# Altium PCB Telemetry_Module_old.PcbDoc (part 2 of 2)
Units mm, origin at the board's own origin, x right, y up, seen from the top; angles counter-clockwise.
Board outline 50 x 50 mm, 4 copper layers (Top Layer, GND, Power, Bottom Layer), stack 0.603 mm thick; 94 components, 68 nets, 386 pads, 193 vias.
Unrouted connection lines stored in the file: 22.
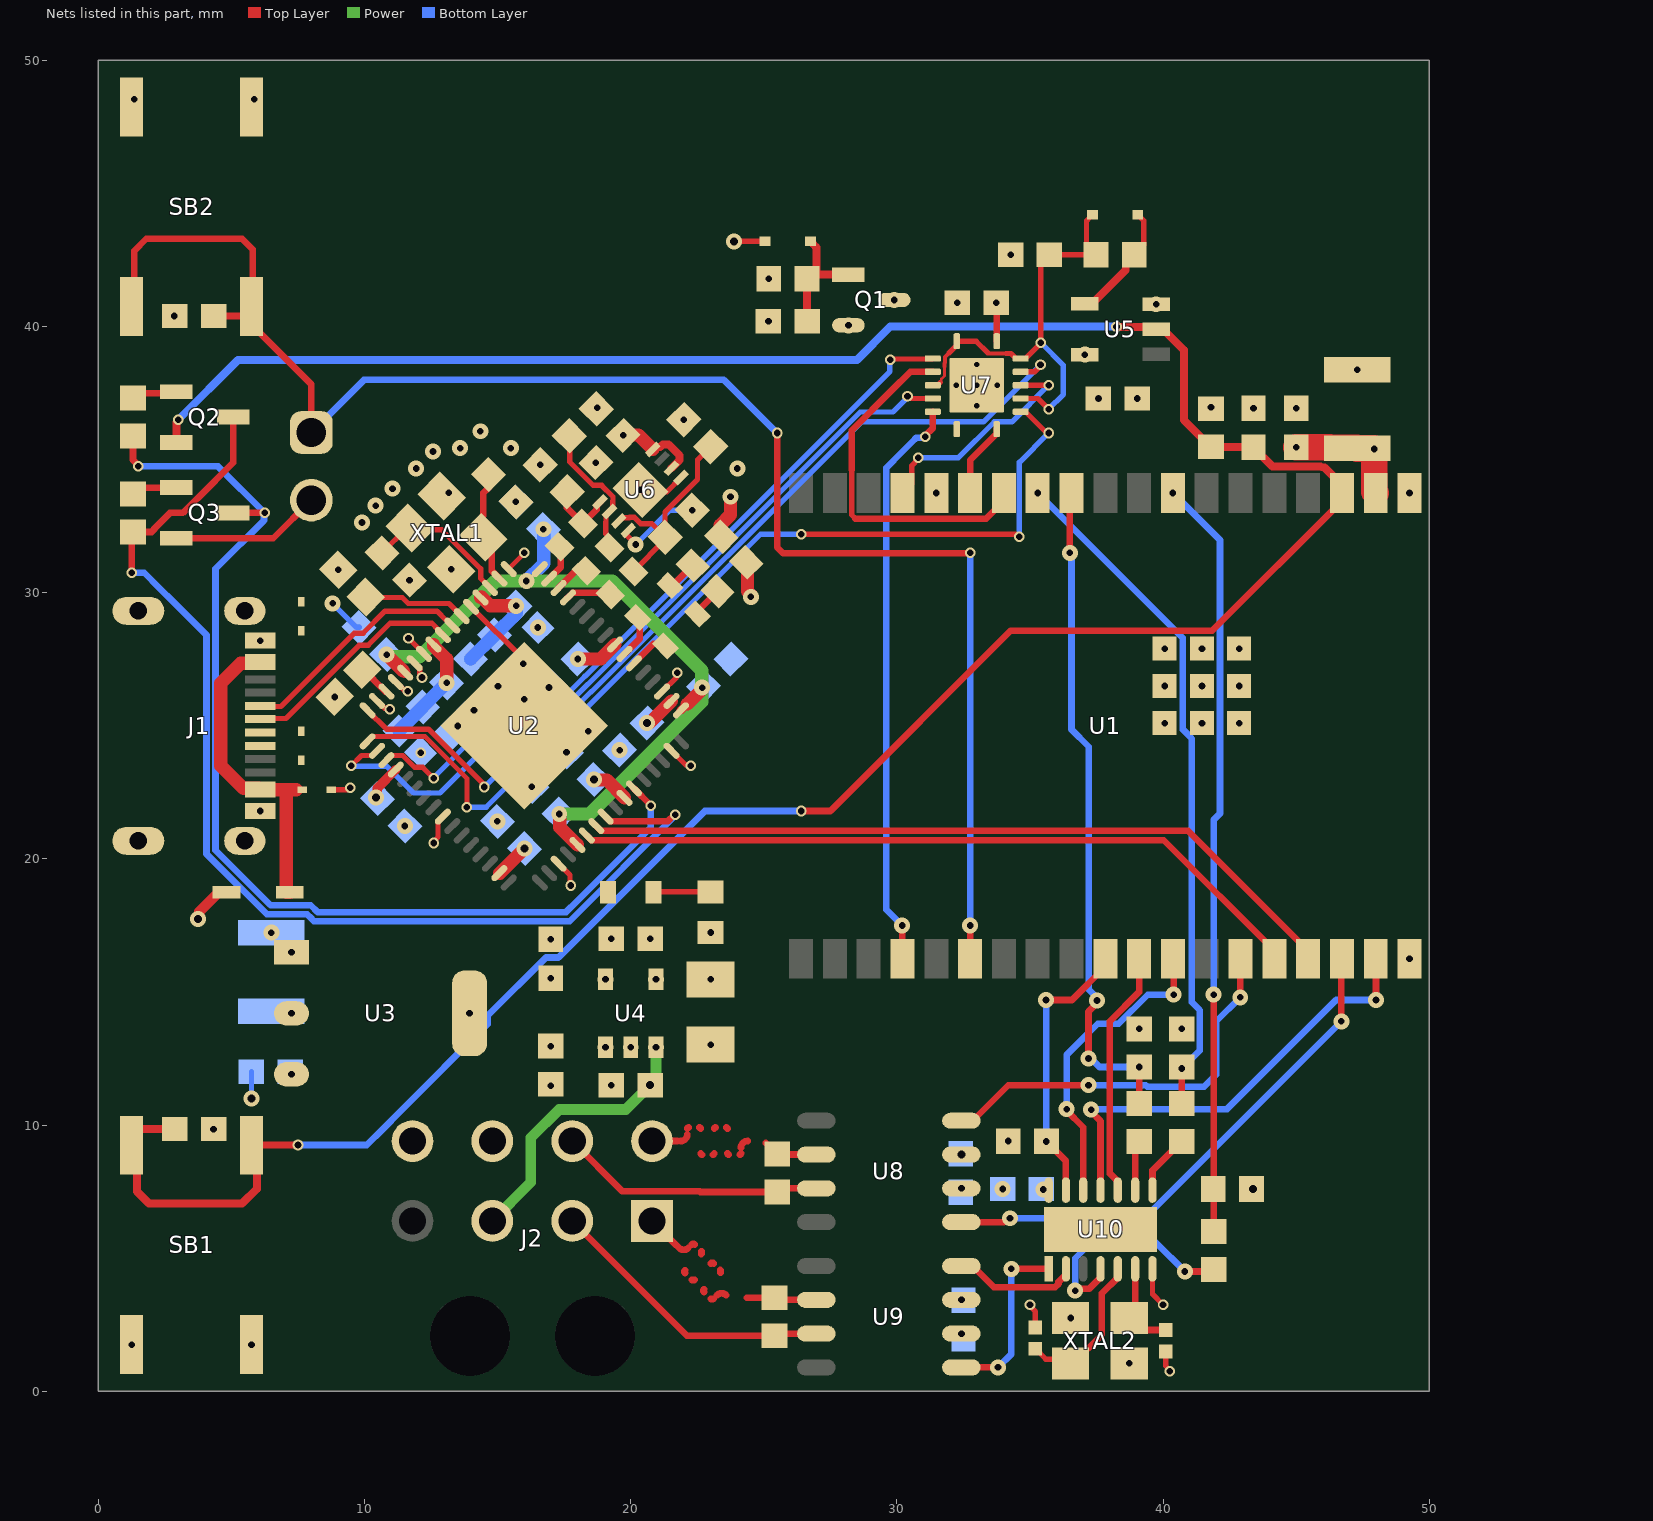
[diagram p4: the nets of this part, all layers, seen from the top]

## Via types
v1: diameter 0.6, hole 0.25, Top Layer to Bottom Layer, 136 vias
v2: diameter 0.4, hole 0.25, Top Layer to Bottom Layer, 40 vias
v3: diameter 0.6, hole 0.3, Top Layer to Bottom Layer, 10 vias
v4: diameter 0.5, hole 0.2, Top Layer to Bottom Layer, 5 vias
v5: diameter 0.5, hole 0.25, Top Layer to Bottom Layer, 2 vias

## Nets (pads, with @x,y where several pads share a name; then routed paths per layer and width w, separated by ;. In a path a pad name is that pad's centre, name@x,y a point inside that pad or via, vN(x,y) a via of type N, cw(c..) or ccw(c..) an arc to the next point about the centre after c; other vN are vias at no path point)
1V8: C10.1 C11.1 C12.1 C21.1 U2.12 U2.37 U2.49 U2.64 | length 28.6
  Top Layer w0.322: U2.49@21.887,25.583 U2.49@22.122,25.819
  Top Layer w0.4: U2.12@11.452,27.06 11.515,26.998 U2.12@11.528,26.998
  Top Layer w0.5: v1(10.828,27.672) 10.841,27.672 U2.12@11.452,27.06 ; v1(17.314,21.686) 17.333,21.667 17.333,21.192 U2.37@17.998,20.528 ; U2.49@22.122,25.819 22.665,26.362 22.665,26.415 v1(22.684,26.434)
  Power w0.5: v1(10.828,27.672) 10.855,27.672 10.936,27.591 12.067,27.591 14.918,30.442 v1(16.076,30.442) 19.303,30.442 22.665,27.08 22.665,26.453 v1(22.684,26.434) 22.665,26.415 22.665,25.9 18.451,21.686 v1(17.314,21.686)
  Bottom Layer w0.5: v1(16.076,30.442) 16.73,31.096 16.73,32.37 v1(16.714,32.386)
3V3: C1.1 C2.1 C6.1 C7.1 C8.1 C9.1 C13.1 C20.1 C22.1 C23.1 C29.1 C32.1 C33.1 C34.1 FB1.1 FB2.1 Q1.2 R1.2 R5.2 R7.1 R9.2 R10.2 R15.2 R16.2 R17.2 R21.2 R22.2 R23.2 R24.2 U1.2 U2.20 U2.31 U2.42 U2.50 U2.56 U4.4 U6.6 U6.8 U8.3 U9.3 U10.14 | length 17.9
  Top Layer w0.3: U6.8@20.826,35.386 20.915,35.475 21.108,35.475 21.205,35.573 21.427,35.573 21.838,35.162 21.838,34.985 U6.6@21.533,34.679
  Top Layer w0.35: v3(10.434,22.316) 10.482,22.364 10.482,22.664 U2.20@11.174,23.356 ; U2.31@15.063,19.467 U2.31@15.079,19.467 ; v3@15.998,20.386 v3(16.014,20.386)
  Top Layer w0.5: U2.31@15.079,19.467 v3@15.998,20.386 ; v1(18.014,27.514) 18.868,27.514 U2.56@19.412,28.058 ; v3(18.614,22.986) 18.633,22.967 19.094,22.967 U2.42@19.765,22.295 ; v1(19.714,35.914) 19.73,35.93 20.282,35.93 U6.8@20.826,35.386 ; v3(20.614,25.114) 20.633,25.133 20.729,25.133 U2.50@21.533,25.937 ; R9.2@23.406,32.106 23.363,32.148 23.363,32.544 23.749,32.93 v1(23.749,33.607) ; R10.2@24.341,31.141 24.383,31.099 24.383,30.054 24.511,29.926 v1(24.511,29.845)
  Top Layer w0.99: v1(45,35.473) C1.1@46.229,35.473
  Top Layer w1: C1.1@46.229,35.473 46.27,35.473 46.298,35.444 47.278,35.444 C1.1@47.3,35.422 47.918,35.422 v1(47.94,35.4) 47.94,33.8 U1.2@47.99,33.75
  other v1: 32.425,3.435 35.5,7.578 34.185,9.4 39.1,13.615 40.7,13.615 20.95,15.475 23,15.475 20.727,17 23,17.235 8.886,26.086 16.507,28.693 16.594,34.806 21.994,36.506 18.748,36.948 41.8,36.975 28.18,40.05 25.173,40.2
  other v2: 12.107,23.993
  other v3: 43.375,7.6 32.425,8.894
3V3_D: C26.1 C28.1 Q1.3 U5.5 U7.14 | length 1.5
  Top Layer w0.25: v1(33.727,40.9) 33.75,40.877 U7.14@33.75,39.45
  other v1: 37.573,37.3 37.06,38.947 29.9,41
\ESP_EN: C27.1 D8.1 R11.1 U7.1 U7.4 U7.10 U7.13 | length 17.1
  Top Layer w0.103: 31.64,37.91 31.669,37.939 31.669,38.03 31.791,38.151 31.791,38.495
  Top Layer w0.108: D8.1@37.324,44.2 D8.1@37.349,44.2
  Top Layer w0.147: 31.791,38.495 31.791,38.62 31.813,38.642 31.813,38.862 31.964,39.014 ; 33.415,39.014 33.442,38.988 34.1,38.988
  Top Layer w0.159: D8.1@37.303,44.179 D8.1@37.324,44.2
  Top Layer w0.183: U7.4@31.621,37.891 31.64,37.91
  Top Layer w0.2: U7.4@31.35,37.8 31.53,37.8 U7.4@31.621,37.891 ; 31.964,39.014 32.2,39.25 32.23,39.25 32.25,39.27 U7.1@32.25,39.45 32.979,39.45 33.415,39.014 ; 34.1,38.988 34.283,38.988 34.47,38.8 U7.13@34.65,38.8 34.83,38.8 35.4,39.37 35.4,39.4 35.4,42.373 C27.1@35.727,42.7 R11.1@37.485,42.7 37.121,43.064 37.121,43.971 37.246,44.097 37.246,44.122 D8.1@37.303,44.179 ; U7.10@34.65,37.3 35.3,37.3 v2(35.7,36.9)
  Bottom Layer w0.2: v2(35.4,39.396) 35.404,39.396 36.254,38.546 36.254,37.454 v2(35.7,36.9)
CAN1_H: J2.6 R19.2 U8.7 | length 10
  Top Layer w0.25: J2.6@17.8,9.4 19.69,7.51 19.88,7.51 21.72,7.51 22.583,7.51 22.608,7.485 R19.2@25.5,7.485 25.64,7.624 U8.7@26.975,7.624
CAN1_L: J2.5 R19.1 U8.6 | length 4.4
  Top Layer w0.25: J2.5@20.8,9.4 21.75,9.4 ; 21.875,9.4 ccw(c21.875,9.65) 22.125,9.65 ; 22.125,9.858 cw(c22.175,9.858) 22.175,9.908 ; 22.579,9.908 cw(c22.579,9.858) 22.629,9.858 ; 22.629,8.942 ccw(c22.679,8.942) 22.679,8.892 ; 23.083,8.892 ccw(c23.083,8.942) 23.133,8.942 ; 23.133,9.858 cw(c23.183,9.858) 23.183,9.908 ; 23.587,9.908 cw(c23.587,9.858) 23.637,9.858 ; 23.637,8.942 ccw(c23.687,8.942) 23.687,8.892 ; 24.091,8.892 ccw(c24.091,8.942) 24.141,8.942 ; 24.141,9.15 cw(c24.391,9.15) 24.391,9.4 ; R19.1@25.075,9.327 25.486,8.915 R19.1@25.5,8.915 25.521,8.894 U8.6@26.975,8.894
CAN2_H: J2.2 R20.2 U9.7 | length 11
  Top Layer w0.25: J2.2@17.8,6.4 22.115,2.085 R20.2@25.4,2.085 25.48,2.165 U9.7@26.975,2.165
CAN2_L: J2.1 R20.1 U9.6 | length 5.7
  Top Layer w0.25: J2.1@20.8,6.4 21.725,5.475 ; 21.813,5.387 ccw(c21.99,5.563) 22.167,5.387 ; 22.041,4.441 cw(c22.094,4.494) 22.041,4.548 ; 22.29,4.191 ccw(c22.344,4.245) 22.397,4.191 ; 22.296,5.516 cw(c22.349,5.462) 22.403,5.516 ; 22.652,5.159 ccw(c22.599,5.213) 22.652,5.266 ; 22.754,3.728 cw(c22.807,3.781) 22.754,3.835 ; 23.003,3.479 ccw(c23.056,3.532) 23.11,3.479 ; 23.009,4.803 cw(c23.062,4.749) 23.116,4.803 ; 23.239,3.608 cw(c23.416,3.431) 23.592,3.608 ; 23.365,4.446 ccw(c23.312,4.5) 23.365,4.553 ; 24.355,3.515 R20.1@25.4,3.515 25.48,3.435 U9.6@26.975,3.435
EE_CS: R12.1 R15.1 U6.1 | length 2.5
  Top Layer w0.25: R15.1@17.606,33.794 17.596,33.785 17.596,33.3 17.606,33.291 17.606,33.194 R12.1@18.2,32.6 18.719,33.119 18.719,33.28 U6.1@18.843,33.404
EE_DATA: R14.1 R17.1 R18.1 U6.3 | length 7.9
  Top Layer w0.2: U6.3@19.551,32.697 19.676,32.822 19.939,32.822 19.951,32.834 20.139,32.834 20.374,32.599 20.79,32.599 R18.1@21.285,32.104 ; R14.1@20.1,30.8 R18.1@21.294,31.994 ; R18.1@21.294,32.094 R18.1@21.285,32.104 ; R17.1@23.006,35.494 22.505,34.993 22.505,34.253 21.285,33.032 R18.1@21.285,32.104
EE_SCK: R13.1 R16.1 U6.2 | length 5.2
  Top Layer w0.2: R16.1@17.694,35.894 17.704,35.885 17.704,34.924 18.591,34.036 18.905,34.036 19.334,33.607 19.334,33.451 19.322,33.439 19.322,33.176 U6.2@19.197,33.051 19.072,32.925 19.072,32.662 19.06,32.65 19.06,32.218 19.2,32.078 R13.1@19.2,31.7
ESP_EN: C3.1 C4.1 Q2.2 R1.1 SB1.2 SB1.4 U1.3 U5.2 | length 112
  Top Layer w0.25: SB1.4@5.75,9.247 5.753,9.25 v2(7.5,9.25) ; v2(26.4,21.8) 27.5,21.8 34.279,28.579 39.779,28.579 40.341,28.579 41.179,28.579 41.741,28.579 41.849,28.579 46.72,33.45 U1.3@46.72,33.75
  Top Layer w0.277: 45.918,34.739 45.934,34.739 45.951,34.722 45.992,34.722 45.997,34.717 46.053,34.717 46.064,34.706
  Top Layer w0.3: C4.1@2.873,9.85 1.632,9.85 1.45,9.668 1.45,7.5 1.9,7.05 5.4,7.05 5.95,7.6 SB1.4@5.95,9.197 ; Q2.2@2.933,35.65 2.933,36.406 3,36.473 v2(3,36.5) ; v2(38.25,40) 38.269,39.981 39.659,39.981 U5.2@39.74,39.9 40,39.9 40.787,39.114 40.787,36.484 41.786,35.485 R1.1@41.8,35.485 43.388,35.485 C3.1@43.4,35.473 43.4,35.45 44.111,34.739 45.918,34.739 ; 46.064,34.706 46.72,34.05 U1.3@46.72,33.75
  Bottom Layer w0.25: v2(7.5,9.25) 10.08,9.25 10.69,9.86 11.34,10.51 14.624,13.794 14.624,14.108 16.814,16.298 17.281,16.298 22.784,21.8 v2(26.4,21.8)
  Bottom Layer w0.3: v2(3,36.5) 5.25,38.75 28.5,38.75 29.75,40 v2(38.25,40)
ESP_IO0_B: JP1.2 Q3.2 | length 5.7
  Top Layer w0.25: Q3.2@2.933,32.05 6.57,32.05 JP1.2@8,33.48
EXT_3V3: C24.1 J2.3 U4.3 | length 10.5
  Power w0.4: J2.3@14.8,6.4 16.247,7.847 16.247,9.523 17.309,10.585 19.812,10.585 v3(20.727,11.5) 20.727,11.554 20.95,11.777 v1(20.95,12.925)
FTDI_DTR: Q3.3 R3.2 U2.43 | length 41.7
  Top Layer w0.25: R3.2@1.3,35.885 1.3,34.991 1.5,34.791 v2(1.5,34.75) ; Q3.3@5.067,33 v2(6.25,33) ; U2.43@20.119,22.649 20.75,22.018 v2(20.75,22)
  Bottom Layer w0.25: v2(1.5,34.75) 4.5,34.75 v2(6.25,33) 6.221,32.971 6.221,32.721 4.4,30.9 4.4,29.672 4.4,28.968 4.4,21.032 4.4,20.328 4.898,19.83 6.47,18.258 7.979,18.258 8.237,18 17.569,18 17.99,18.421 18.329,18.76 20.75,21.181 v2(20.75,22)
FTDI_RTS: Q2.3 R4.2 U2.40 | length 43.3
  Top Layer w0.25: v2(1.25,30.75) 1.25,32.235 R4.2@1.3,32.285 1.999,32.285 2.11,32.395 2.11,32.418 2.235,32.543 2.692,33 3.175,33 3.631,33.457 3.757,33.582 5.067,34.892 Q2.3@5.067,36.6 ; U2.40@19.058,21.588 19.235,21.411 21.382,21.411 21.634,21.663 v2(21.674,21.663)
  Bottom Layer w0.25: v2(1.25,30.75) 1.722,30.75 2.302,30.17 2.8,29.672 4.061,28.411 4.061,20.188 6.329,17.919 7.839,17.919 7.964,17.794 8.097,17.661 17.709,17.661 21.674,21.626 v2(21.674,21.663)
FTDI_TCK: U2.16 U7.12 | length 34
  Top Layer w0.2: U2.16@10.113,25.583 10.822,24.875 12.396,24.875 14.462,22.809 14.462,22.738 v2(14.5,22.7) ; U7.12@34.65,38.3 35.177,38.3 35.394,38.516 v2(35.394,38.566)
  Bottom Layer w0.2: v2(14.5,22.7) 16.858,25.058 17.287,25.058 18.512,26.282 18.524,26.282 28.663,36.421 33.25,36.421 v2(35.394,38.566) v2(35.394,38.566)
FTDI_TDI: U2.17 U7.9 | length 36.3
  Top Layer w0.185: U2.17@10.113,24.417 10.29,24.593 12.279,24.593 13.844,23.029 v2(13.844,21.946)
  Top Layer w0.2: v2(26.4,32.2) 34.446,32.2 34.546,32.1 v2(34.6,32.1) ; U7.9@34.65,36.8 34.83,36.8 35.592,36.038 35.662,36.038 v2(35.7,36)
  Bottom Layer w0.185: 16.736,24.109 17.484,24.857 17.495,24.857 17.65,25.012
  Bottom Layer w0.2: v2(13.844,21.946) 14.573,21.946 16.736,24.109 ; 17.65,25.012 17.687,25.012 24.875,32.2 v2(26.4,32.2) ; v2(34.6,32.1) 34.6,34.9 v2(35.7,36)
FTDI_TDO: U2.18 U7.5 | length 29.7
  Top Layer w0.2: v2(9.5,23.5) 9.884,23.884 10.288,23.884 U2.18@10.467,24.063 ; v2(30.4,37.379) 30.454,37.379 30.533,37.3 U7.5@31.35,37.3
  Bottom Layer w0.2: v2(9.5,23.5) 9.513,23.487 10.823,23.487 11.835,22.474 12.837,22.474 15.333,24.97 16.362,24.97 16.738,25.347 17.168,25.347 18.392,26.571 18.405,26.571 28.622,36.789 29.851,36.789 30.4,37.337 v2(30.4,37.379)
FTDI_TMS: U2.19 U7.2 | length 27.8
  Top Layer w0.192: 11.475,23.847 11.879,23.443 12.186,23.443
  Top Layer w0.2: U2.19@10.82,23.71 10.997,23.886 11.436,23.886 11.475,23.847 ; 12.186,23.443 v2(12.6,23.028) ; v2(29.75,38.75) 29.78,38.78 31.33,38.78 U7.2@31.35,38.8
  Bottom Layer w0.2: v2(12.6,23.028) 12.6,23.062 14.797,25.259 16.242,25.259 16.619,25.636 17.048,25.636 18.272,26.86 18.285,26.86 29.735,38.31 29.735,38.735 v2(29.75,38.75)
GND: C1.2 C2.2 C3.2 C4.2 C5.2 C6.2 C7.2 C8.2 C9.2 C10.2 C11.2 C12.2 C14.2 C15.2 C16.2 C17.2 C18.2 C19.2 C20.2 C21.2 C22.2 C23.2 C24.2 C25.2 C26.2 C27.2 C28.2 C29.2 C30.2 C31.2 C32.2 C33.2 C34.2 C35.2 C36.2 D2.1 D3.1 D4.1 D5.2 D6.1 J1.A1_B12 J1.B1_A12 J1.SH1 J1.SH2 J1.SH3 J1.SH4 J2.7 J2.8 R2.1 R6.1 R8.1 SB1.1 SB1.3 SB2.1 SB2.3 U1.1 U1.15 U1.38 U1.39 U2.1 U2.5 U2.10 U2.11 U2.13 U2.15 U2.25 U2.35 U2.47 U2.51 U2.65 U3.1 U4.2 U5.3 U6.5 U6.9 U7.7 U7.15 U8.2 U9.2 U10.7 U10.15 XTAL1.2 XTAL1.4 XTAL2.2 XTAL2.4 | length 19.9
  Top Layer w0.089: D4.1@8.746,22.6 D4.1@8.817,22.6
  Top Layer w0.108: D5.2@25.003,43.203 25.046,43.203 D5.2@25.049,43.2
  Top Layer w0.185: v2(12.6,20.6) 12.6,20.658 12.765,20.823 12.765,21.411 U2.25@12.942,21.588
  Top Layer w0.2: D4.1@8.817,22.6 9.334,22.6 9.41,22.676 v2(9.464,22.676) ; U2.15@10.467,25.937 10.48,25.937 10.754,25.663 10.912,25.663 v2(10.95,25.625) ; U2.13@11.174,26.644 11.188,26.644 11.5,26.332 11.587,26.332 v2(11.625,26.294) ; v2(11.65,28.295) 11.65,28.292 12.235,27.707 U2.10@12.235,27.705 ; U2.11@11.881,27.351 12.067,27.165 12.067,26.96 12.156,26.871 v2(12.156,26.817) ; U2.5@14.002,29.472 15.966,27.509 v1(15.966,27.334) ; U2.1@15.417,30.887 15.417,30.902 16,31.485 v2(16,31.5) ; U2.35@17.29,19.82 17.716,19.395 17.716,19.034 v2(17.75,19) ; v1(20.365,33.865) 20.436,33.794 21.355,33.794 U6.5@21.886,34.326 ; U2.51@21.18,26.29 21.712,26.823 21.712,26.962 v2(21.75,27) ; U2.47@21.533,24.063 22.058,23.538 22.212,23.538 v2(22.25,23.5) ; v3(23.876,43.205) 23.879,43.203 D5.2@25.003,43.203 ; v2(35,3.25) 35,3.196 35.2,2.996 C35.2@35.2,2.4 ; U10.7@39.6,4.6 39.6,3.65 v2(40,3.25) ; C36.2@40.1,1.5 40.1,0.954 40.25,0.804 v2(40.25,0.75)
  Bottom Layer w0.2: v3(5.75,11) C14.2@5.75,12 ; v1(8.8,29.6) 9.7,28.7 C10.2@9.8,28.7
  other v1: 38.725,1.05 1.25,1.754 5.75,1.754 32.425,2.165 36.525,2.75 33.973,7.6 32.425,7.624 4.327,9.85 17,11.475 19.273,11.5 20,12.925 23,13.025 49.26,16.25 7.255,16.49 17,16.977 19.273,17 6.5,17.228 11.514,21.236 14.986,21.414 16.286,22.714 17.586,24.014 19.586,24.086 18.4,24.8 13.506,24.995 40.06,25.1 41.46,25.1 42.86,25.1 14.114,25.586 16,26 16.928,26.441 15.014,26.486 40.06,26.5 41.46,26.5 42.86,26.5 40.06,27.9 41.46,27.9 42.86,27.9 11.69,30.474 9.012,30.866 13.258,30.879 9.906,32.639 10.414,33.274 15.684,33.416 13.158,33.764 31.48,33.75 49.26,33.75 11.049,33.909 11.938,34.671 24.003,34.671 18.686,34.886 12.573,35.306 13.589,35.433 15.494,35.433 14.351,36.068 43.4,36.927 45,36.927 39.027,37.3 47.3,38.378 2.848,40.4 39.74,40.84 32.273,40.9 25.185,41.8 34.273,42.7 1.35,48.547 5.85,48.547
  other v4: 33,37.025 32.225,37.8 33,37.8 33.775,37.8 33,38.575
  other v5: 6.075,21.8 6.075,28.2
NetC5_1: C5.1 JP1.1 SB2.2 SB2.4 U1.25 | length 62
  Top Layer w0.25: SB2.4@1.35,41.054 1.35,42.85 1.8,43.3 5.4,43.3 5.8,42.9 SB2.2@5.8,40.753 ; C5.1@4.327,40.4 5.543,40.4 SB2.2@5.75,40.607 ; SB2.2@5.75,40.753 SB2.2@5.75,40.607 ; JP1.1@8,36.02 8,37.83 5.75,40.08 SB2.2@5.75,40.607 ; v2(25.5,36) 25.5,31.711 25.733,31.478 32.728,31.478 v2(32.75,31.5) ; U1.25@32.75,16.25 v1(32.75,17.5)
  Bottom Layer w0.25: JP1.1@8,36.02 9.98,38 23.5,38 v2(25.5,36) ; v1(32.75,17.5) v2(32.75,31.5)
NetC13_2: C13.2 D5.1 Q1.1 R2.2 | length 4.7
  Top Layer w0.3: C13.2@26.627,40.2 26.627,41.788 R2.2@26.615,41.8 R2.2@26.765,41.95 ; D5.1@26.751,43.2 26.776,43.2 26.854,43.122 26.854,43.097 26.98,42.971 26.98,42.164 R2.2@26.765,41.95 ; Q1.1@28.18,41.95 R2.2@26.765,41.95
NetC16_1: C16.1 C18.1 FB1.2 U2.9 | length 4.2
  Top Layer w0.5: U2.9@12.588,28.058 12.588,28.007 13.086,27.509 v1(13.086,26.614)
  Bottom Layer w0.5: FB1.2@11.293,24.807 11.293,24.814 12.186,25.707 C16.1@12.186,25.714 v1(13.086,26.614)
NetC17_1: C17.1 C19.1 FB2.2 U2.4 | length 4.2
  Top Layer w0.5: U2.4@14.356,29.826 14.407,29.826 14.726,29.507 v1(15.693,29.507)
  Bottom Layer w0.5: C17.1@13.986,27.514 C19.1@14.886,28.414 15.709,29.237 15.709,29.491 v1(15.693,29.507)
NetC30_1: C30.1 U2.2 XTAL1.1 | length 4.3
  Top Layer w0.25: XTAL1.1@14.46,32.081 14.389,32.152 14.389,32.824 14.46,32.894 14.46,33.746 14.673,33.959 14.673,34.427 C30.1@14.656,34.444 ; XTAL1.1@14.714,32.208 14.785,32.138 14.785,30.812 U2.2@15.063,30.533
NetC31_1: C31.1 U2.3 XTAL1.3 | length 5.6
  Top Layer w0.2: C31.1@10.662,31.502 11.595,32.435 XTAL1.3@11.702,32.435 11.773,32.364 12.899,32.364 14.366,30.897 14.366,30.537 14.71,30.193 U2.3@14.71,30.18
NetC35_1: C35.1 U10.5 XTAL2.3 | length 5.9
  Top Layer w0.2: C35.1@35.2,1.6 35.591,1.209 36.366,1.209 XTAL2.3@36.525,1.05
  Top Layer w0.25: XTAL2.3@36.525,1.05 36.625,1.05 37.694,2.119 37.694,3.672 38.3,4.278 U10.5@38.3,4.6
NetC36_1: C36.1 U10.6 XTAL2.1 | length 3.5
  Top Layer w0.25: U10.6@38.95,4.6 38.95,2.975 XTAL2.1@38.725,2.75 39.175,2.3 C36.1@40.1,2.3
NetD6_2: D6.2 R5.1 | length 2.2
  Top Layer w0.2: D6.2@20.851,18.75 20.866,18.765 R5.1@23,18.765
NetD7_2: D7.2 R10.1 | length 1.2
  Top Layer w0.25: D7.2@22.502,29.202 22.502,29.302 R10.1@23.259,30.059
NetD8_2: D8.2 R11.2 U5.4 | length 4.5
  Top Layer w0.108: D8.2@39.051,44.2 D8.2@39.076,44.2
  Top Layer w0.159: D8.2@39.076,44.2 D8.2@39.097,44.179
  Top Layer w0.2: R11.2@38.915,42.7 39.28,43.064 39.28,43.971 39.154,44.097 39.154,44.122 D8.2@39.097,44.179
  Top Layer w0.3: U5.4@37.06,40.852 37.321,40.852 38.598,42.13 38.598,42.382 R11.2@38.915,42.7
NetD9_2: D9.2 R9.1 | length 1.2
  Top Layer w0.25: D9.2@21.467,30.267 21.567,30.267 R9.1@22.324,31.024
NetQ2_1: Q2.1 R3.1 | length 1.6
  Top Layer w0.25: R3.1@1.4,37.215 1.685,37.5 Q2.1@2.9,37.5
NetQ3_1: Q3.1 R4.1 | length 1.9
  Top Layer w0.25: R4.1@1.2,33.615 R4.1@1.3,33.715 1.535,33.95 Q3.1@2.933,33.95
NetR7_2: R7.2 U2.14 | length 1.2
  Top Layer w0.25: R7.2@9.955,27.113 U2.14@10.778,26.29
  Top Layer w0.381: R7.2@9.913,27.113 R7.2@9.955,27.113
NetR8_2: R8.2 U2.6 | length 3.9
  Top Layer w0.2: R8.2@10.038,29.84 10.055,29.823 11.416,29.823 11.642,29.597 13.171,29.597 U2.6@13.649,29.119
NetR12_2: R12.2 U2.63 | length 1.4
  Top Layer w0.25: U2.63@16.937,30.533 17.375,30.971 17.375,31.685 R12.2@17.33,31.73
NetR13_2: R13.2 U2.62 | length 1.3
  Top Layer w0.25: U2.62@17.29,30.18 17.964,30.853 18.307,30.853 R13.2@18.33,30.83
NetR14_2: R14.2 U2.61 | length 1.7
  Top Layer w0.25: U2.61@17.644,29.826 17.821,30.003 18.814,30.003 18.887,29.93 R14.2@19.23,29.93
NetR18_2: R18.2 U6.4 | length 3.4
  Top Layer w0.2: U6.4@19.904,32.343 19.798,32.237 19.798,32.202 v1(20.188,31.812)
  Bottom Layer w0.2: v1(20.188,31.812) 21.481,33.106 v1(22.306,33.106)
NetR21_1: R21.1 R26.1 U1.12 | length 25.8
  Top Layer w0.25: R26.1@40.7,10.815 v1(40.7,12.125) R21.1@40.7,12.185
  Bottom Layer w0.25: v1(35.29,33.75) 40.739,28.301 40.739,24.861 40.781,24.819 41.079,24.521 41.079,15.181 41.079,14.619 41.379,14.319 41.379,13.897 41.379,13.334 41.379,12.804 v1(40.7,12.125)
NetR22_1: R22.1 R27.1 U1.8 | length 28.6
  Top Layer w0.25: R27.1@41.9,6 41.9,7.585 R22.1@41.885,7.6 41.9,7.615 v1(41.9,14.9)
  Bottom Layer w0.25: v1(40.37,33.75) 42.139,31.981 42.139,28.181 42.139,27.619 42.139,26.781 42.139,26.219 42.139,25.381 42.139,24.819 42.139,21.707 41.9,21.468 v1(41.9,14.9)
NetR23_1: R23.1 U1.29 U10.13 | length 10.5
  Top Layer w0.25: v1(35.6,14.7) 36.58,14.7 37.83,15.95 U1.29@37.83,16.25 ; v1(35.615,9.386) 36.35,8.652 U10.13@36.35,7.556
  Bottom Layer w0.25: v1(35.6,14.7) 35.615,14.685 v1(35.615,9.386)
NetR24_1: R24.1 R25.1 U1.11 | length 25.2
  Top Layer w0.25: v1(36.5,31.5) 36.5,33.69 U1.11@36.56,33.75 ; v1(37.2,12.5) 37.2,14.265 37.52,14.585 v1(37.52,14.68) ; R25.1@39.1,10.815 v1(39.1,12.185)
  Bottom Layer w0.25: v1(36.5,31.5) 36.56,31.44 36.56,24.86 37.205,24.215 37.205,15.09 37.52,14.775 v1(37.52,14.68) ; v1(37.2,12.5) 37.295,12.5 37.61,12.185 v1(39.1,12.185)
NetR25_2: R25.2 U10.9 | length 1.9
  Top Layer w0.25: U10.9@38.95,7.556 38.95,9.235 R25.2@39.1,9.385
NetR26_2: R26.2 U10.8 | length 2.3
  Top Layer w0.25: U10.8@39.6,7.556 39.6,8.298 40.686,9.385 R26.2@40.7,9.385
NetR27_2: R27.2 U10.4 | length 8.6
  Top Layer w0.25: v1(36.699,3.778) 36.766,3.845 37.217,3.845 37.65,4.278 U10.4@37.65,4.6 ; v1(40.819,4.5) 41.831,4.5 R27.2@41.9,4.569
  Bottom Layer w0.25: v1(36.699,3.778) 36.699,4.999 37.3,5.6 39.719,5.6 v1(40.819,4.5)
NetU1_13: U1.13 U7.3 | length 13.5
  Top Layer w0.192: 28.305,34.617 28.305,32.923 28.442,32.786
  Top Layer w0.25: 28.305,34.617 28.305,36.103 29.821,37.619 30.502,38.3 30.719,38.3 U7.3@31.35,38.3 ; 28.442,32.786 33.289,32.786 33.356,32.786 34.02,33.45 U1.13@34.02,33.75
NetU1_14: U1.14 U7.8 | length 2.8
  Top Layer w0.25: U1.14@32.75,33.75 32.75,34.98 33.75,35.98 U7.8@33.75,36.15
NetU1_16: U1.16 U7.11 | length 8.6
  Top Layer w0.2: U1.16@30.21,33.75 30.56,34.1 30.56,34.781 30.8,35.021 v2(30.8,35.075) ; U7.11@34.65,37.8 v2(35.7,37.8)
  Bottom Layer w0.2: v2(30.8,35.075) 32.313,35.075 33.659,36.421 34.321,36.421 v2(35.7,37.8)
NetU1_23: U1.23 U7.6 | length 21.7
  Top Layer w0.25: v1(30.2,17.5) 30.2,16.26 U1.23@30.21,16.25 ; v2(31.058,35.858) 31.058,35.899 31.35,36.191 U7.6@31.35,36.8
  Bottom Layer w0.25: v1(30.2,17.5) 29.6,18.1 29.6,34.694 30.221,35.315 30.56,35.654 30.736,35.83 31.03,35.83 v2(31.058,35.858)
NetU1_30: U1.30 U10.10 | length 9.3
  Top Layer w0.25: U10.10@38.3,7.556 38.3,7.878 38,8.178 38,13.9 39.1,15 U1.30@39.1,16.25
NetU1_31: U1.31 U10.12 | length 11.7
  Top Layer w0.25: v1(36.375,10.6) 36.375,10.545 37,9.92 U10.12@37,7.556 ; U1.31@40.37,16.25 40.4,16.22 v1(40.4,14.9)
  Bottom Layer w0.25: v1(36.375,10.6) 36.375,12.635 36.521,12.781 36.919,13.179 37.547,13.807 38.331,13.807 39.424,14.9 v1(40.4,14.9)
NetU1_33: U1.33 U8.4 | length 15.1
  Top Layer w0.25: U8.4@32.425,10.164 32.85,10.164 34.186,11.5 v1(37.2,11.5) ; v1(42.9,14.8) 42.9,16.24 U1.33@42.91,16.25
  Bottom Layer w0.25: v1(37.2,11.5) 39.352,11.5 39.406,11.446 40.419,11.446 40.981,11.446 41.546,11.446 42,11.9 42,13.9 v1(42.9,14.8)
NetU1_34: U1.34 U2.38 | length 27.9
  Top Layer w0.25: U2.38@18.351,20.881 18.528,20.704 40.026,20.704 44.18,16.55 U1.34@44.18,16.25
NetU1_35: U1.35 U2.39 | length 29
  Top Layer w0.25: U2.39@18.705,21.235 18.881,21.058 40.942,21.058 45.45,16.55 U1.35@45.45,16.25
NetU1_36: U1.36 U8.1 | length 19.8
  Top Layer w0.25: U8.1@32.425,6.354 34.01,6.354 34.155,6.5 v1(34.25,6.5) ; v1(46.7,13.9) 46.7,16.23 U1.36@46.72,16.25
  Bottom Layer w0.25: v1(34.25,6.5) 39.3,6.5 v1(46.7,13.9)
NetU1_37: U1.37 U10.11 | length 17.1
  Top Layer w0.25: v1(37.3,10.58) 37.3,10.5 37.65,10.15 U10.11@37.65,7.556 ; U1.37@47.99,16.25 48,16.24 v1(48,14.7)
  Bottom Layer w0.25: v1(37.3,10.58) 37.32,10.6 42.4,10.6 46.5,14.7 v1(48,14.7)
RX_CAN: U9.4 U10.2 | length 4.7
  Top Layer w0.25: U9.4@32.425,4.705 32.85,4.705 33.647,3.908 35.945,3.908 36.07,4.033 36.07,4.109 36.35,4.389 U10.2@36.35,4.6
RX_LED: D7.1 U2.54 | length 1.5
  Top Layer w0.25: U2.54@20.119,27.351 20.847,28.079 21.218,28.079 D7.1@21.298,27.998
TX_CAN: U9.1 U10.1 | length 6.7
  Top Layer w0.25: U9.1@32.425,0.895 32.428,0.898 33.797,0.898 v1(33.8,0.9) ; v1(34.3,4.6) U10.1@35.7,4.6
  Bottom Layer w0.25: v1(33.8,0.9) 34.3,1.4 v1(34.3,4.6)
TX_LED: D9.1 U2.55 | length 1.6
  Top Layer w0.25: U2.55@19.765,27.705 20.344,28.283 20.344,28.982 D9.1@20.263,29.063
USB_3V3: C15.1 C25.1 R6.2 U3.2 U3.4 U4.1 U4.5
  other v1: 19.05,12.925 17,12.965 7.255,14.2 13.945,14.2 19.05,15.475 17,15.523
USB_5V: C14.1 D1.C U3.3 | length 1.6
  Top Layer w0.4: v3(3.75,17.75) 3.788,17.788 3.788,18.018 4.52,18.75 D1.C@4.81,18.75
  other v1: 7.255,11.91
USB_D_N: D2.2 J1.A7 J1.B7 U2.7 | length 8.9
  Top Layer w0.2: J1.B7@6.075,25.75 6.098,25.727 6.86,25.727 9.618,28.485 9.95,28.485 10.773,29.308 12.72,29.308 13.061,28.967 13.08,28.967 13.282,28.765 U2.7@13.295,28.765
USB_D_P: D3.2 J1.A6 J1.B6 U2.8 | length 8.6
  Top Layer w0.2: J1.A6@6.075,25.25 6.098,25.273 7.048,25.273 9.806,28.031 10.138,28.031 10.961,28.854 12.532,28.854 12.74,28.646 12.74,28.627 12.942,28.425 U2.8@12.942,28.412
USB_VBUS: D1.A D4.2 J1.A4_B9 J1.B4_A9 | length 12.1
  Top Layer w0.5: J1.A4_B9@6.075,27.4 6.025,27.35 5.35,27.35 4.6,26.6 4.6,23.5 5.45,22.65 6.025,22.65 J1.B4_A9@6.075,22.6 7.099,22.6 ; D1.A@7.19,18.75 7.072,18.75 7.052,18.77 7.052,22.553 7.099,22.6 ; 7.432,22.6 7.099,22.6
pads on no net: J1.A5 J1.A8 J1.B5 J1.B8 J2. J2.4 U1.4 U1.5 U1.6 U1.7 U1.9 U1.10 U1.17 U1.18 U1.19 U1.20 U1.21 U1.22 U1.24 U1.26 U1.27 U1.28 U1.32 U2.21 U2.22 U2.23 U2.24 U2.26 U2.27 U2.28 U2.29 U2.30 U2.32 U2.33 U2.34 U2.36 U2.41 U2.44 U2.45 U2.46 U2.48 U2.52 U2.53 U2.57 U2.58 U2.59 U2.60 U5.1 U6.7 U7.15_1 U7.15_2 U7.15_3 U7.15_4 U8.5 U8.8 U9.5 U9.8 U10.3

## Polygon pours and split planes (outlines as drawn)
USB_5V on Power "NONET_L01_P-001" (solid, shelved, pour order 10): 3,18.018 4.5,18.018 4.5,13.5 5.3,12.7 7.722,12.7 7.899,12.522 7.899,11.608 7.722,11.43 3.32,11.43 3,11.75
USB_3V3 on Power "NONET_L01_P-001" (solid, shelved, pour order 12): 6,15.25 5.75,15 5.75,13.25 6,13 8.5,13 9.75,11.75 15,11.75 15.5,12.25 19.25,12.25 19.5,12.5 19.5,15.75 19.25,16 15.5,16 15,16.5 9.75,16.5 8.5,15.25
3V3 on Power "NONET_L01_P-001" (solid, shelved, pour order 16): 20,14.5 20.25,14.25 24.05,14.25 24.25,14.45 24.25,17.5 24,17.75 20.25,17.75 20,17.5
3V3 on Power "NONET_L01_P-001" (solid, shelved, pour order 20): 25,23 25,35.5 23,37.5 18,37.5 16.484,35.984 16.484,29.984
3V3 on Power "NONET_L03_P019" (solid, shelved, pour order 19): 20,17.4 18.9,18.5 12.5,18.5 8.551,22.449 8.551,26.317 12.817,26.317 16.5,30 18,30 25,23 25,16.75
3V3 on Power "NONET_L01_P-001" (solid, shelved, pour order 21): 20,17.4 18.9,18.5 12.5,18.5 12.5,18.554 8.551,22.503 8.551,26.317 9.188,26.954 13.454,26.954 16.484,29.984 18.016,29.984 25,23 25,16.817
3V3_D on Power "NONET_L01_P-001" (solid, shelved, pour order 22): 29.04,40.46 29.306,40.194 34.456,40.194 34.75,40.488 34.75,41.312 34.312,41.75 29.5,41.75 29.04,41.29
3V3_D on Power "NONET_L01_P-001" (solid, shelved, pour order 24): 34.456,40.194 34.806,40.194 36.75,38.25 36.75,36.5 37,36.25 38,36.25 38.25,36.5 38.25,39.25 35.75,41.75 34.312,41.75
3V3 on Power "NONET_L01_P-001" (solid, shelved, pour order 25): 25,35.5 25,36 28.75,39.75 28.75,40.5 28.25,41 21.5,41 18,37.5
3V3 on Power "NONET_L01_P-001" (solid, shelved, pour order 9): 21,40.5 28.5,48 44,48 49,43 49,35 48.5,34.5 41.75,34.5 40.25,36 40.25,44.25 39.75,44.75 31.971,44.75 28.75,40.5
3V3 on Power "NONET_L01_P-001" (solid, shelved, pour order 26): 25,16.75 25,15 25.75,14.25 41.237,14.25 44,11.487 44,7.2 43.669,6.869 42.831,6.869 42.5,7.2 42.5,11.831 41.428,12.903 28.905,12.903 28.7,12.698 28.7,12 31,9.7 33.4,9.7 33.7,10 34.7,10 34.9,9.8 34.9,8.9 35.3,8.5 35.7,8.5 35.9,8.3 35.9,7.3 35.831,7.3 33.303,4.772 33.303,3.052 32.951,2.7 31.794,2.7 31.4,3.094 31.4,7.1 26.5,12 26.5,12.718 26.318,12.9 25.6,12.9 24.25,14.25 20.25,14.25 20,14.5 20,17.4
GND on Power "NONET_L01_P-001" (solid, remove dead copper, shelved, pour order 28): 0.306,0.306 49.694,0.306 49.694,49.694 0.653,49.694 0.564,49.605
GND on GND "NONET_L01_P-001" (solid, shelved, pour order 0): 0,0 50,0 50,50 0,50
GND on Bottom Layer "NONET_L01_P-001" (solid, shelved, pour order 2): 0,0 50,0 50,50 0,50
GND on Top Layer "NONET_L01_P-001" (solid, shelved, pour order 1): 0,0 50,0 50,50 0,50

## Keep-outs
Keep-Out Layer:
  region: 50,17.25 45.4,17.25 45.4,24.75 50,24.75

## Other copper
Power:
  pour cut-out: 35.7,8.5 35.9,8.3 35.9,8.5
  pour cut-out: 26.5,12 26.5,12.718 26.314,12.903 26.311,12.9 25.6,12.9

## Silkscreen, mask and mechanical layers (free items; w line width, h text height)
Mechanical 1:
  the board outline again, w0.254

## Text inside footprints (layer, text, board x,y; h text height)
D2: Top 3D Body "*" at 6.985,29.604 h1.27 r270
D3: Top 3D Body "*" at 8.255,23.774 h1.27 r90
D4: Top 3D Body "*" at 8.683,23.235 h1.27 r180
D5: Top 3D Body "*" at 26.56,43.835 h1.27 r180
D8: Top 3D Body "*" at 37.54,43.565 h1.27
SB1: Top Overlay "*" at 0.513,1.182 h1.27 r90; Top 3D Body "*" at 2.037,2.566 h1.27 r90
SB2: Top Overlay "*" at 6.487,48.818 h1.27 r270; Top 3D Body "*" at 4.963,47.434 h1.27 r270
U5: Top 3D Body "*" at 39.289,39.671 h1.27 r180